# Altium PCB OFFICIAL_PCB.PcbDoc (part 1 of 2)
Units mil, origin at the board's own origin, x right, y up, seen from the top; angles counter-clockwise.
Board outline 1720 x 1725 mil, 2 copper layers (Top Layer, Bottom Layer); 67 components, 51 nets, 260 pads, 158 vias.
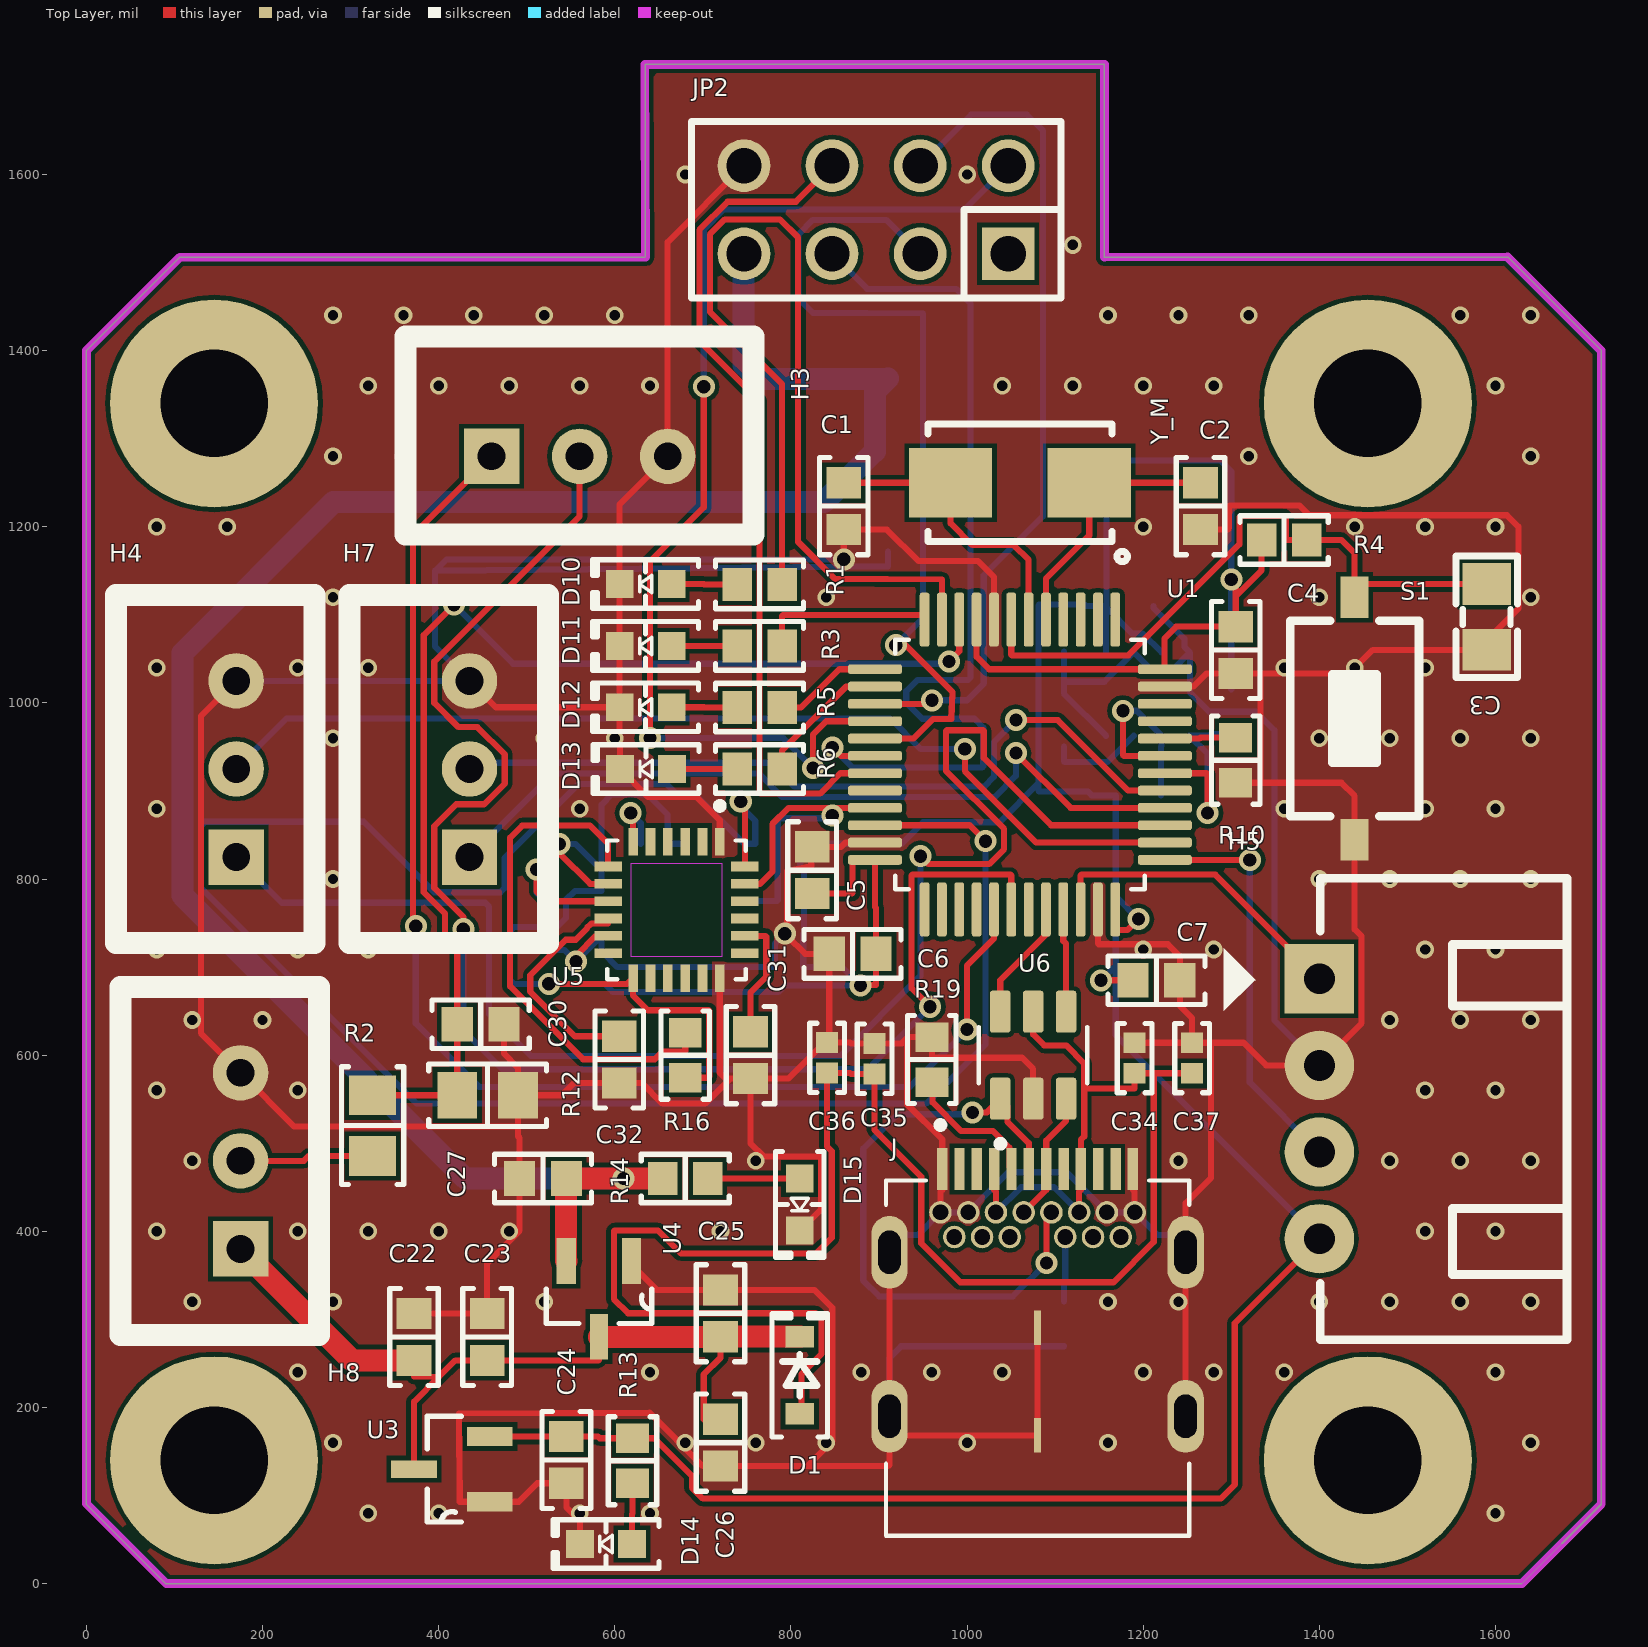
[diagram p0: Top Layer view]
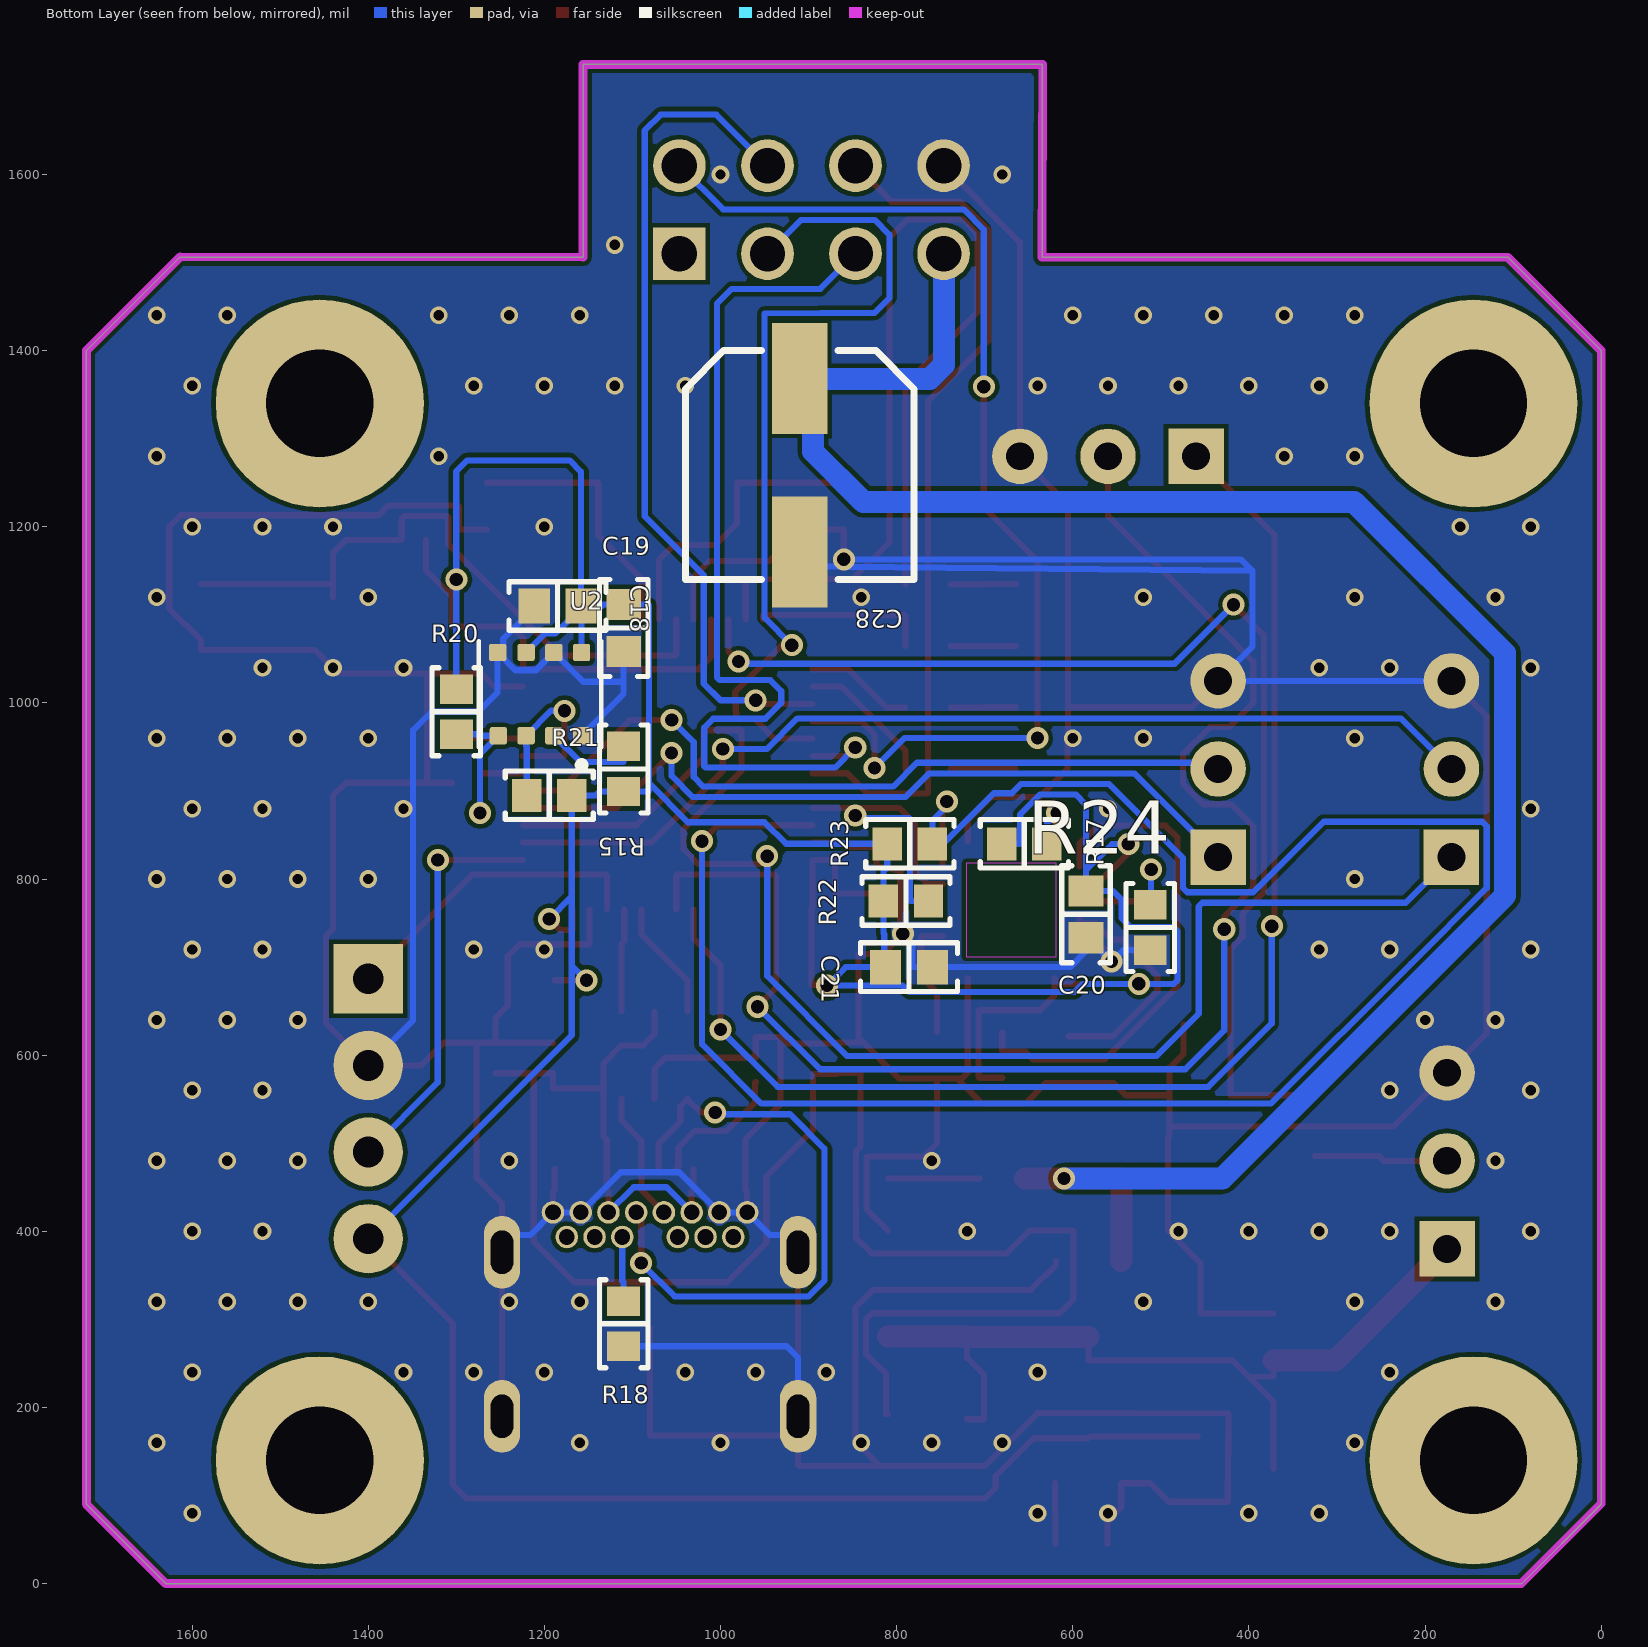
[diagram p1: Bottom Layer view, seen from below]
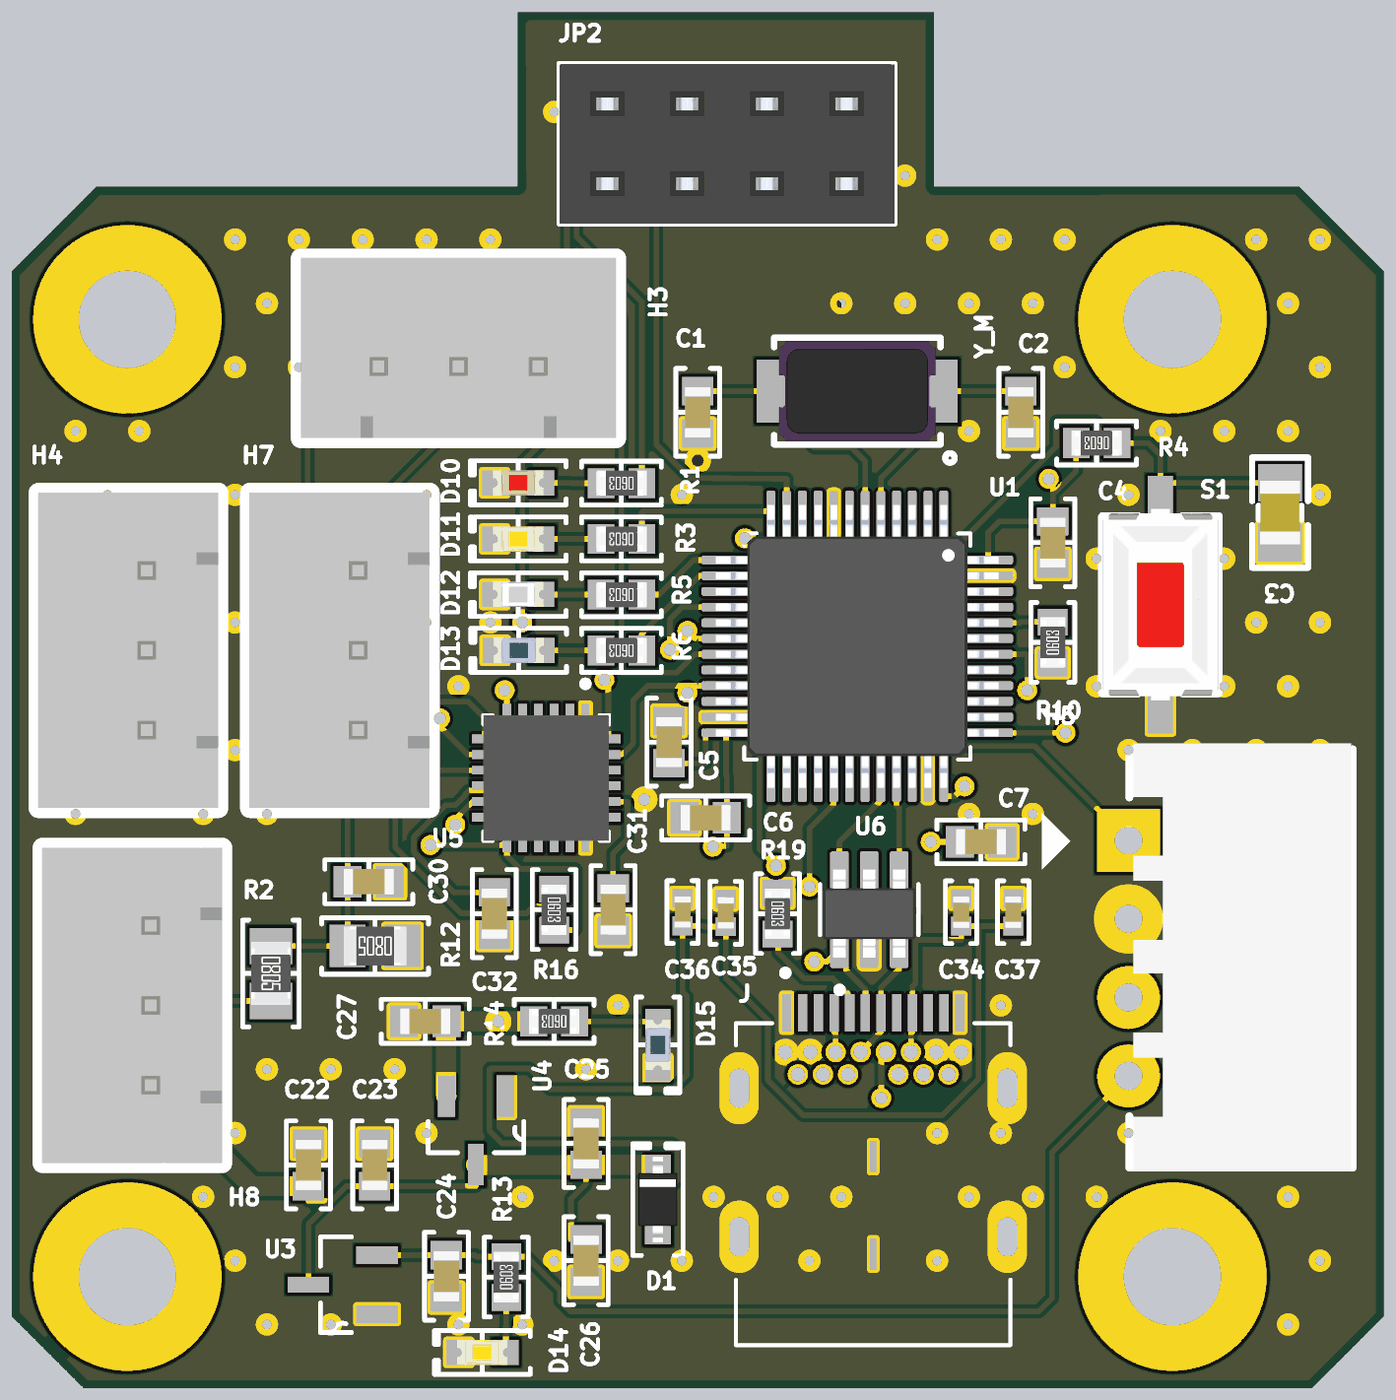
[diagram p2: 3D render of the assembled board from above, using the file's embedded part models]
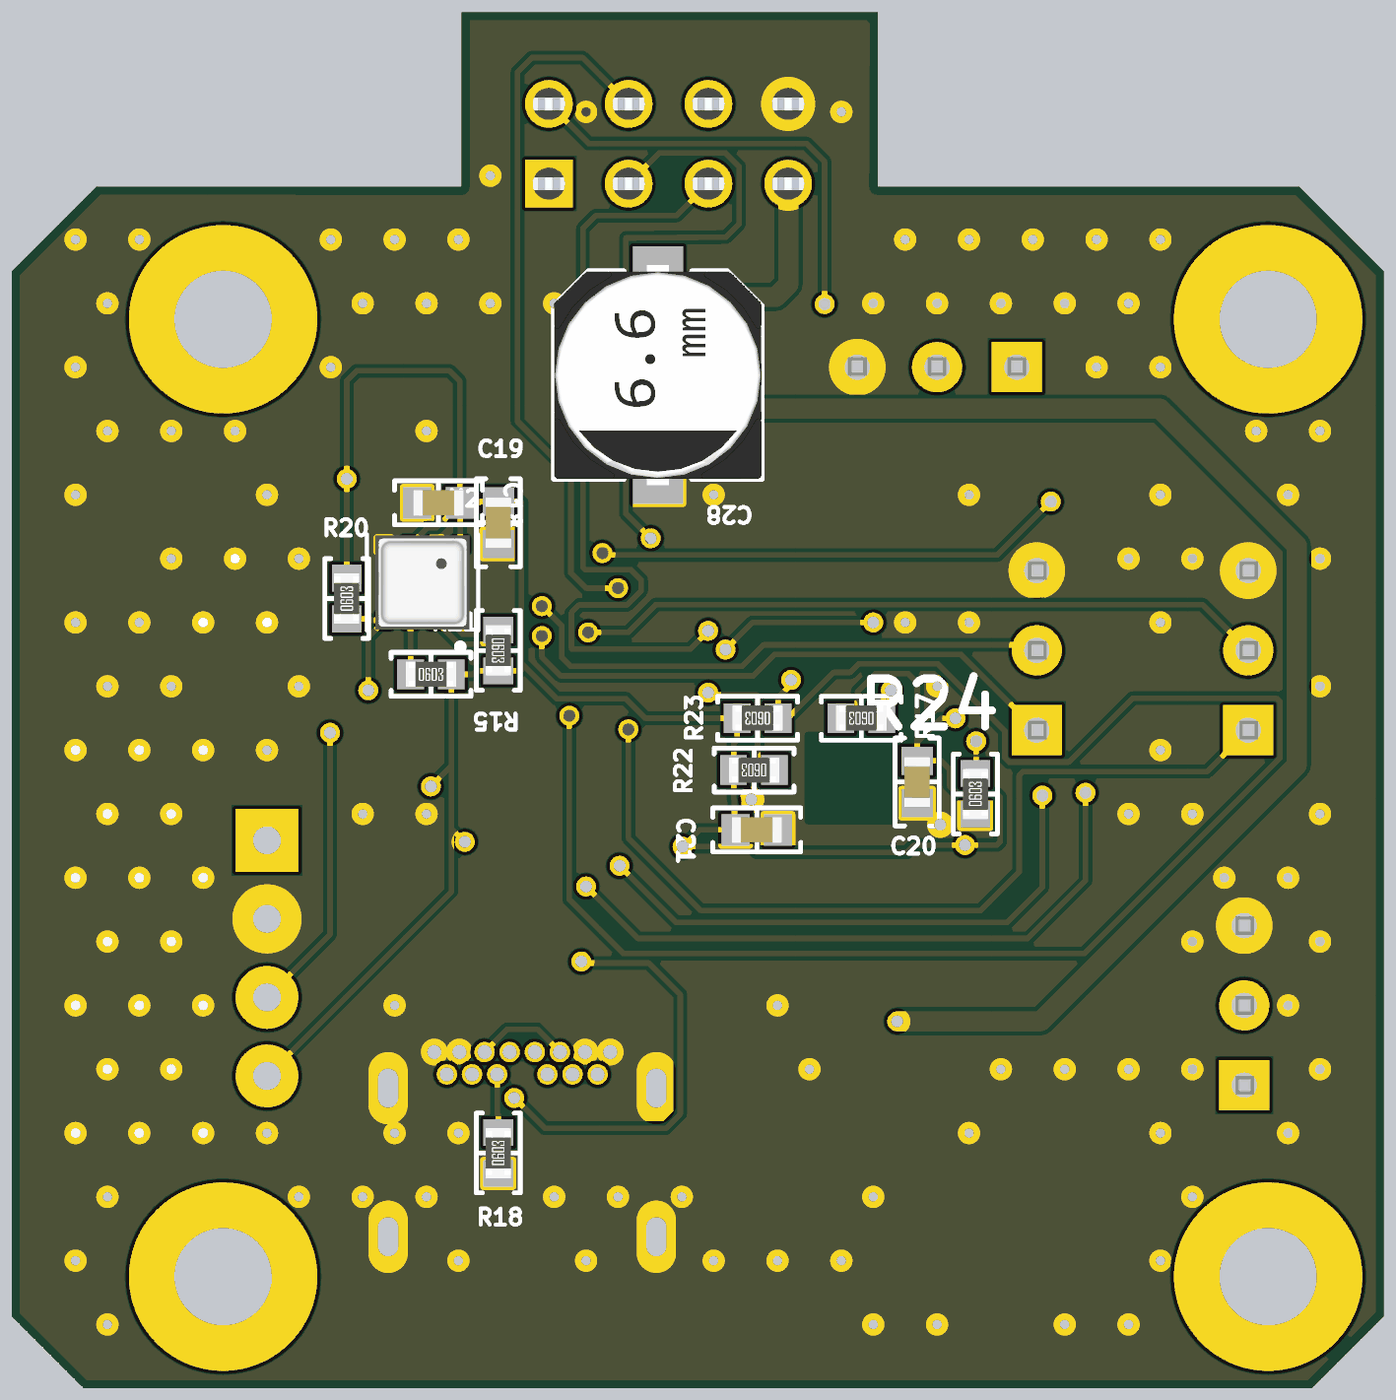
[diagram p3: 3D render of the assembled board from below, using the file's embedded part models]

## Layer stack, top to bottom
Top Solder: solder mask 0.4, Solder Resist, Dk 3.5
Top Layer: signal copper 1.4
Dielectric 1: dielectric 12.6, FR-4, Dk 4.8
Bottom Layer: signal copper 1.4
Bottom Solder: solder mask 0.4, Solder Resist, Dk 3.5

## Board outline
90,0 1630,0 1720,90 1720,1400 1613.85,1506.15 1156,1506.15 1156,1725 634.5,1725 634.5,1506.15 106.15,1506.15 0,1400 0,90

## Design rules (kind name [scope] priority, off if disabled: settings)
Clearance [All] p1: gap=5 ignorepadtopadclearanceinfootprint=FALSE
PolygonConnect PolygonConnect_2 [All vs IsNamedPolygon('GND_L02_P000')] p1: connectstyle=Direct reliefconductorwidth=10 reliefentries=4 polygonreliefangle="90 Angle" airgapwidth=10
PolygonConnect PolygonConnect_1 [All vs IsNamedPolygon('GND_L01_P001')] p2: connectstyle=Direct reliefconductorwidth=10 reliefentries=4 polygonreliefangle="90 Angle" airgapwidth=10
PolygonConnect [All] p3: connectstyle=Relief reliefconductorwidth=10 reliefentries=4 polygonreliefangle="90 Angle" airgapwidth=10
RoutingVias [All] p1: holewidth=15 width=25 viastyle="Through Hole" minholewidth=10 minwidth=10 maxholewidth=25 maxwidth=30
SolderMaskExpansion [All] p1: expansion=4 istentingtop=FALSE
Width [All] p1: maxlimit=30 minlimit=7 preferedwidth=7 minimp=50.000000 maximp=50.000000 favimp=50.000000
30 further rules are at their usual default settings.

## Classes and differential pairs
component class Sensor: C18 C19 C20 C21 C28 C31 C32 C34 C35 C36 C37 D1 H3 H4 H7 J JP2 R15 R16 R17 R18 R19 R20 R21 R22 R23 R24 U2 U5 U6
component class Power_Supply: C22 C23 C24 C25 C26 C27 D14 D15 R13 R14 U3 U4
component class MCU: C1 C2 C3 C4 C5 C6 C7 C30 D10 D11 D12 D13 H5 H8 R1 R2 R3 R4 R5 R6 R10 R12 S1 U1 Y_M

## Components (designator, comment, footprint, x,y, rotation, side; value= is the part's Value field where it differs from the comment)
C1 "20 pF" "CAP 0603_1608" 860,1223.43 r90 top
C2 "20 pF" "CAP 0603_1608" 1265,1223.43 r90 top
C3 "20pF" "tu 0805" 1590,1097.77 r270 top
C4 "0.1 µF" "CAP 0603_1608" 1305,1060 r90 top
C5 "0.1 µF" "CAP 0603_1608" 824,810 r270 top
C6 "0.1 µF" "CAP 0603_1608" 870,715 r0 top
C7 "0.1 µF" "CAP 0603_1608" 1215,685 r180 top
C18 "0.1 µF" "CAP 0603_1608" 1185,1110 r180 bottom
C19 "0.1 µF" "CAP 0603_1608" 1110,1085 r90 bottom
C20 "0.1 µF" "CAP 0603_1608" 585,760 r90 bottom
C21 "0.1 µF" "CAP 0603_1608" 785.98,700 r180 bottom
C22 "10 µF" "CAP 0603_1608" 372,280 r270 top
C23 "0.1µF" "CAP 0603_1608" 455,280 r270 top
C24 "10 µF" "CAP 0603_1608" 545,140.43 r90 top
C25 "10 µF" "CAP 0603_1608" 720,306.93 r270 top
C26 "0.1µF" "CAP 0603_1608" 720,160 r90 top
C27 "10 µF" "CAP 0603_1608" 518.43,460 r0 top
C28 "220 µF" "CAP ALSMD 6.6MM H6.1MM" 910,1270 r270 bottom
C30 "0.1 µF" "CAP 0603_1608" 447.68,635 r180 top
C31 "220 pF" "CAP 0603_1608" 754,600 r90 top
C32 "0.1 µF" "CAP 0603_1608" 605,595 r90 top
C34 "0.1 µF" "CAP 0402_1005" 1190.24,596.73 r90 top
C35 "0.1 µF" "CAP 0402_1005" 895,596 r90 top
C36 "0.1 µF" "CAP 0402_1005" 841,597 r90 top
C37 "0.1 µF" "CAP 0402_1005" 1255.51,596.73 r90 top
D1 "BAT60JFILM" SOD323 810,236.56 r90 top
D10 "Red" "LED 0603_1608 RED" 635,1135 r180 top
D11 "Yellow" "LED 0603_1608 YELLOW" 635,1064.71 r180 top
D12 "Green" "LED 0603_1608 GREEN" 635,995 r180 top
D13 "Blue" "LED 0603_1608 BLUE" 635.47,925 r180 top
D14 "Yellow" "LED 0603_1608 YELLOW" 590,45 r180 top
D15 "Blue" "LED 0603_1608 BLUE" 810,430.47 r270 top
H3 "Header 3P 2.54 Duc Thang" XH2.54M-3 460,1280 r0 top
H4 "Header 3P 2.54 Duc Thang" XH2.54M-3 170,825 r90 top
H5 "Header 4P 2.54 Duc Cong" "Header 4P DC 2.54" 1401,685.85 r0 top
H7 "Header 3P 2.54 Duc Thang" XH2.54M-3 435,825 r90 top
H8 "Header 3P 2.54 Duc Thang" XH2.54M-3 175,380 r90 top
J "SS-52400-002" BELFUSE_SS-52400-002 1080,190 r0 top
JP2 "JP 2x4 2.54" "JP 2x4 CT" 896.68,1560 r180 top
R1 "680 Ohms" "RES 0603_1608" 764.41,1134.57 r180 top
R2 "68 kOhms" "RES 0805_2012" 325,520 r270 top
R3 "680 Ohms" "RES 0603_1608" 764.41,1064.71 r180 top
R4 "10 kOhms" "RES 0603_1608" 1360,1185 r180 top
R5 "680 Ohms" "RES 0603_1608" 764.41,994.86 r180 top
R6 "680 Ohms" "RES 0603_1608" 764.41,925 r180 top
R10 "10 kOhms" "RES 0603_1608" 1305,935 r90 top
R12 "10 kOhms" "RES 0805_2012" 455.55,554.45 r180 top
R13 "680 Ohms" "RES 0603_1608" 620,139.44 r90 top
R14 "680 Ohms" "RES 0603_1608" 680,460 r180 top
R15 "10 kOhms" "RES 0603_1608" 1110,925 r270 bottom
R16 "4.7 kOhms" "RES 0603_1608" 680,600 r270 top
R17 "4.7 kOhms" "RES 0603_1608" 655,840 r0 bottom
R18 "5.11 Ohms" "RES 0603_1608" 1110,295 r90 bottom
R19 "5.11 Ohms" "RES 0603_1608" 960,595 r270 top
R20 "4.7 kOhms" "RES 0603_1608" 1300,990 r90 bottom
R21 "4.7 kOhms" "RES 0603_1608" 1194.41,895 r180 bottom
R22 "4.7 kOhms" "RES 0603_1608" 789.41,775 r0 bottom
R23 "4.7 kOhms" "RES 0603_1608" 785,840 r0 bottom
R24 "4.7 kOhms" "RES 0603_1608" 512,745 r90 bottom
S1 "SW-SMD" SW-SMD 1440,982.2 r90 top
U1 "STM32F103C8T6" QFP50P900X900X160-48N 1060,930 r270 top
U2 "BME680" PSON80P300X300X100-8N 1205,1010 r270 bottom
U3 "MCP1700T-3302E/TT" SOT95P237X112-3N 415,130 r180 top
U4 "MCP1700T-3302E/TT" SOT95P237X112-3N 582,323.36 r270 top
U5 "MPU-6050" QFN50P400X400X95-24N 670,765 r270 top
U6 "USBLC6-2SC6" SOT95P280X145-6N 1075,600 r90 top
Y_M "8 MHz" "NDK NX5032GA" 1060,1250 r0 top

## Footprints (in the part's own frame and the unit in brackets; to place one, negate y for a bottom-side part, rotate by r counter-clockwise, add the part's x,y. Pads: shape width x height; smd on the part's side, far side on the other; paste and mask are expansions set on the pad)
BELFUSE_SS-52400-002 [mm]
  rect 0.3x1.2 smd: A1(-2.75,7.13) A2(-2.25,7.13) A3(-1.75,7.13) A4(-1.25,7.13) A5(-0.75,7.13) A6(-0.25,7.13) A7(0.25,7.13) A8(0.75,7.13) A9(1.25,7.13) A10(1.75,7.13) A11(2.25,7.13) A12(2.75,7.13)
  round 0.65 hole 0.45: B1(2.8,5.88) B2(2.4,5.17) B3(1.6,5.17) B4(1.2,5.88) B5(0.8,5.17) B6(0.4,5.88) B7(-0.4,5.88) B8(-0.8,5.17) B9(-1.2,5.88) B10(-1.6,5.17) B11(-2.4,5.17) B12(-2.8,5.88) G1(2,5.88) G2(-2,5.88)
  rect 0.2x1 smd: G3(0,2.55) G4(0,-0.55)
  oval 1.05x2.1 hole 0.65 slot 1.25 at 90 deg: S1(-4.27,4.73) S2(4.27,4.73) S3(-4.27,0) S4(4.27,0)
  silkscreen extent -4.37,-3.45 4.37,8.5
"CAP 0402_1005" [mm] "Chip Capacitor, 2-Leads, Body 1.02x0.51mm, IPC Medium Density"
  rect 0.6x0.64 smd: 1(-0.44,0) 2(0.44,0)
  silkscreen extent -1,-0.5 1,0.5, body extent -0.5,-0.26 0.5,0.26, height 0.52
"CAP 0603_1608" [mm] "Chip Capacitor, 2-Leads, Body 1.60x0.80mm, IPC Medium Density"
  rect 0.9x1 smd: 1(-0.675,0) 2(0.675,0)
  silkscreen extent -1.4,-0.7 1.4,0.7, body extent -0.8,-0.41 0.8,0.41, height 0.82
"CAP ALSMD 6.6MM H6.1MM" [mm] "Aluminum Electrolytic Capacitor, Body 6.60x6.60x6.10mm, IPC Low Density"
  rect 3.2x1.6 smd: 1(-2.5,0) 2(2.5,0)
  silkscreen extent -3.3,-3.3 3.3,3.3, body extent -3.5,-3.3 3.5,3.3, height 6.1
"Header 4P DC 2.54" [mil]
  rect 78.74x78.74 hole 35: 1(-1,1)
  round 78.74 hole 35: 2(-1,-97.42) 3(-1,-195.85) 4(-1,-294.28)
  silkscreen extent -110,-409 280,115, body extent 5,-413 278,123, height 290
"JP 2x4 CT" [mm] "8 pins, dual row, straight, gold plating"
  rect 1.52x1.52 hole 1.02: 1(-3.81,1.27)
  round 1.52 hole 1.02: 2(-1.27,1.27) 3(1.27,1.27) 4(3.81,1.27) 5(3.81,-1.27) 6(1.27,-1.27) 7(-1.27,-1.27) 8(-3.81,-1.27)
  silkscreen extent -5.33,-2.54 5.33,2.54, body extent -5.33,-2.54 5.33,2.54, height 8.51
"LED 0603_1608 BLUE" [mm] "Chip Diode, 2-Leads, Body 1.60x0.80mm, IPC Medium Density"
  rect 0.8x0.8 smd: 1(-0.75,0) 2(0.75,0)
  silkscreen extent -1.52,-0.7 1.52,0.7, body extent -0.8,-0.4 0.8,0.4, height 0.53
"LED 0603_1608 GREEN" [mm] "Chip Diode, 2-Leads, Body 1.60x0.80mm, IPC Medium Density"
  rect 0.8x0.8 smd: 1(-0.75,0) 2(0.75,0)
  silkscreen extent -1.52,-0.7 1.52,0.7, body extent -0.8,-0.4 0.8,0.4, height 0.53
"LED 0603_1608 RED" [mm] "Chip Diode, 2-Leads, Body 1.60x0.80mm, IPC Medium Density"
  rect 0.8x0.8 smd: 1(-0.75,0) 2(0.75,0)
  silkscreen extent -1.52,-0.7 1.52,0.7, body extent -0.8,-0.4 0.8,0.4, height 0.53
"LED 0603_1608 YELLOW" [mm] "Chip Diode, 2-Leads, Body 1.60x0.80mm, IPC Medium Density"
  rect 0.8x0.8 smd: 1(-0.75,0) 2(0.75,0)
  silkscreen extent -1.52,-0.7 1.52,0.7, body extent -0.8,-0.4 0.8,0.4, height 0.53
"NDK NX5032GA" [mm] "Crystal, 2-Leads, Body 5.00x3.20mm, IPC Medium Density"
  rect 2.4x2 smd: 1(-2,0) 2(2,0)
  silkscreen extent -2.65,-1.7 2.65,1.7, body extent -2.5,-1.6 2.5,1.6, height 1.2
PSON80P300X300X100-8N [mm]
  rrect25% 0.5x0.5 smd: 1(1.2,1.2) 2(1.2,0.4) 3(1.2,-0.4) 4(1.2,-1.2) 5(-1.2,-1.22) 6(-1.2,-0.4) 7(-1.2,0.4) 8(-1.2,1.2)
  silkscreen extent -1.53,-1.77 2.14,1.77, body extent -1.5,-1.5 1.5,1.5, height 1
QFN50P400X400X95-24N [mm]
  rect 0.79x0.28 smd: 1(-1.97,1.25) 2(-1.97,0.75) 3(-1.97,0.25) 4(-1.97,-0.25) 5(-1.97,-0.75) 6(-1.97,-1.25) 13(1.97,-1.25) 14(1.97,-0.75) 15(1.97,-0.25) 16(1.97,0.25) 17(1.97,0.75) 18(1.97,1.25)
  rect 0.28x0.79 smd: 7(-1.25,-1.97) 8(-0.75,-1.97) 9(-0.25,-1.97) 10(0.25,-1.97) 11(0.75,-1.97) 12(1.25,-1.97) 19(1.25,1.97) 20(0.75,1.97) 21(0.25,1.97) 22(-0.25,1.97) 23(-0.75,1.97) 24(-1.25,1.97)
  Keep-Out Layer region: 1.35,-1.3 -1.35,-1.3 -1.35,1.3 1.35,1.3
  silkscreen extent -3.1,-2 2,2, body extent -2,-2 2,2, height 0.93
QFP50P900X900X160-48N [mm]
  rrect50% 1.56x0.28 smd: 1(-4.18,2.75) 2(-4.18,2.25) 3(-4.18,1.75) 4(-4.18,1.25) 5(-4.18,0.75) 6(-4.18,0.25) 7(-4.18,-0.25) 8(-4.18,-0.75) 9(-4.18,-1.25) 10(-4.18,-1.75) 11(-4.18,-2.25) 12(-4.18,-2.75) 25(4.18,-2.75) 26(4.18,-2.25) 27(4.18,-1.75) 28(4.18,-1.25) 29(4.18,-0.75) 30(4.18,-0.25) 31(4.18,0.25) 32(4.18,0.75) 33(4.18,1.25) 34(4.18,1.75) 35(4.18,2.25) 36(4.18,2.75)
  rrect50% 0.28x1.56 smd: 13(-2.75,-4.18) 14(-2.25,-4.18) 15(-1.75,-4.18) 16(-1.25,-4.18) 17(-0.75,-4.18) 18(-0.25,-4.18) 19(0.25,-4.18) 20(0.75,-4.18) 21(1.25,-4.18) 22(1.75,-4.18) 23(2.25,-4.18) 24(2.75,-4.18) 37(2.75,4.18) 38(2.25,4.18) 39(1.75,4.18) 40(1.25,4.18) 41(0.75,4.18) 42(0.25,4.18) 43(-0.25,4.18) 44(-0.75,4.18) 45(-1.25,4.18) 46(-1.75,4.18) 47(-2.25,4.18) 48(-2.75,4.18)
  silkscreen extent -6.15,-3.6 3.6,3.6, body extent -4.5,-4.5 4.5,4.5, height 1.6
"RES 0603_1608" [mm] "Chip Resistor, 2-Leads, Body 1.60x0.80mm, IPC Medium Density"
  rect 0.85x0.95 smd: 1(-0.65,0) 2(0.65,0)
  silkscreen extent -1.27,-0.7 1.27,0.7, body extent -0.8,-0.4 0.8,0.4, height 0.45
"RES 0805_2012" [mm] "Chip Resistor, 2-Leads, Body 2.00x1.25mm, IPC Medium Density"
  rect 1.15x1.35 smd: 1(-0.875,0) 2(0.875,0)
  silkscreen extent -1.7,-0.9 1.7,0.9, body extent -1,-0.62 1,0.63, height 0.6
SOD323 [mm] "SOD, 2-Leads, Body 1.25x2.50mm, IPC Medium Density"
  rect 0.625x0.83 smd: 1(-1.113,0) 2(1.113,0)
  silkscreen extent -1.78,-0.8 1.78,0.8, body extent -1.36,-0.62 1.36,0.62, height 1.05
SOT95P237X112-3N [mil]
  rect 52x22 smd: 1(-43,37) 2(-43,-37)
  rect 52x20 smd: 3(43,0)
  silkscreen extent -11,-60 28,60
SOT95P280X145-6N [mm]
  rrect25% 1.21x0.59 smd: 1(-1.255,0.95) 2(-1.255,0) 3(-1.255,-0.95) 4(1.255,-0.95) 5(1.255,0) 6(1.255,0.95)
  silkscreen extent -2.65,-1.56 0.81,1.56, body extent -1.53,-1.46 1.27,1.46, height 1.4
SW-SMD [mm] "Switch SMD type"
  rect 1.2x0.8 smd: 1(-3.5,0) 2(3.5,0)
  silkscreen extent -2.82,-1.85 2.82,1.85, body extent -3.05,-1.85 3.05,1.85, height 2.5
"tu 0805" [mm] "Compoment SMD 80x50mil"
  rect 1.2x1.4 smd: 1(-0.946,-0.003) 2(0.954,-0.003)
  silkscreen extent -1.75,-0.89 1.75,0.89, body extent -1.01,-0.64 1.01,0.63, height 0.61
XH2.54M-3 [mm]
  rect 1.6x1.6 hole 0.8: 1(0,0)
  round 1.6 hole 0.8: 2(2.54,0) 3(5.08,0)
  silkscreen extent -2.48,-2.26 7.56,3.46, body extent -2.48,-2.26 7.56,3.48, height 6.91

## Part data
C1 C2: library part C0603C200K8HAC7867, "CAP CER 20PF 10V X8R 0603", Device Package="0603 (1608 Metric)", Manufacturer=KEMET, Operating Temperature="-55°C ~ 150°C", Supplier Part Number 1=399-C0603C200K8HAC7867CT-ND, Temperature Coefficient=X8R, Tolerance=±10%, Voltage - Rated=10V, Applications="General Purpose", Capacitance="20 pF", componentlink1description=Datasheet, componentlink1url=https://connect.kemet.com:7667/gateway/IntelliData-ComponentDocumentation/1.0/download/datasheet/C0603C200K8HAC7867, componentlink2description="DigiKey Link", componentlink2url=https://www.digikey.com/en/products/detail/kemet/C0603C200K8HAC7867/7946748, Features="Low ESL, High Temperature", lastupdated="2/9/2024 8:09:18 PM", Lifecycle Status=Active, Minimum Order=1, Mounting Type="Surface Mount, MLCC", Package / Case="0603 (1608 Metric)", packaging=TapeAndReel, Part Number=C0603C200K8HAC7867, Part Status=Active, partid=52193, Price=0.01, series="SMD Comm X8R HT150C", Size / Dimension="0.063\" L x 0.031\" W (1.60mm x 0.80mm)", Supplier 1=DigiKey, Thickness (Max)="0.034\" (0.87mm)"
C3: library part "Tu 0805 20pF 50V 10%", "Dán", Chung_Loai=Dán, Don_Vi=Con, Ma_Hang=MH004558, So_Chan=2, Ten_Linh_Kien="Tụ 0805 20P 10% 50V"
C4 C5 C6 C7: library part VJ0603Y104MXQCW1BC, "CAP CER 0.1UF 10V X7R 0603", Device Package="0603 (1608 Metric)", Manufacturer="Vishay Vitramon", Operating Temperature="-55°C ~ 125°C", Supplier Part Number 1=720-VJ0603Y104MXQCW1BCCT-ND, Temperature Coefficient=X7R, Tolerance=±20%, Voltage - Rated=10V, Applications="General Purpose", Capacitance="0.1 µF", componentlink1description=Datasheet, componentlink1url=https://www.vishay.com/docs/28548/vjw1bcbascomseries.pdf, componentlink2description="DigiKey Link", componentlink2url=https://www.digikey.com/en/products/detail/vishay-vitramon/VJ0603Y104MXQCW1BC/8305323, lastupdated="2/9/2024 8:09:54 PM", Lifecycle Status=Active, Minimum Order=1, Mounting Type="Surface Mount, MLCC", Package / Case="0603 (1608 Metric)", packaging=TapeAndReel, Part Number=VJ0603Y104MXQCW1BC, Part Status=Active, partid=34594, Price=0.01, series="VJ W1BC", Size / Dimension="0.063\" L x 0.031\" W (1.60mm x 0.80mm)", Supplier 1=DigiKey, Thickness (Max)="0.034\" (0.87mm)"
C18 C19 C20 C21 C32: library part C0603C104J8RAC7867, "CAP CER 0.1UF 10V X7R 0603", Device Package="0603 (1608 Metric)", Manufacturer=KEMET, Operating Temperature="-55°C ~ 125°C", Supplier Part Number 1=399-C0603C104J8RAC7867CT-ND, Temperature Coefficient=X7R, Tolerance=±5%, Voltage - Rated=10V, Applications="Bypass, Decoupling", Capacitance="0.1 µF", componentlink1description=Datasheet, componentlink1url=https://connect.kemet.com:7667/gateway/IntelliData-ComponentDocumentation/1.0/download/datasheet/C0603C104J8RACTU, componentlink2description="DigiKey Link", componentlink2url=https://www.digikey.com/en/products/detail/kemet/C0603C104J8RAC7867/2199774, lastupdated="2/9/2024 8:09:18 PM", Lifecycle Status=Active, Minimum Order=1, Mounting Type="Surface Mount, MLCC", Package / Case="0603 (1608 Metric)", packaging=TapeAndReel, Part Number=C0603C104J8RAC7867, Part Status=Active, partid=52171, Price=0.07, series="SMD Comm X7R", Size / Dimension="0.063\" L x 0.031\" W (1.60mm x 0.80mm)", Supplier 1=DigiKey, Thickness (Max)="0.034\" (0.87mm)"
C22 C24 C25 C27: library part KGM15CS60J106MT, "CAP CER 10UF 6.3V X6S 0603", Device Package="0603 (1608 Metric)", Manufacturer="KYOCERA AVX", Operating Temperature="-55°C ~ 105°C", Supplier Part Number 1=478-KGM15CS60J106MTCT-ND, Temperature Coefficient=X6S, Tolerance=±20%, Voltage - Rated=6.3V, Applications="General Purpose", Capacitance="10 µF", componentlink1description=Datasheet, componentlink1url=https://datasheets.kyocera-avx.com/x6s-dielectric.pdf, componentlink2description="DigiKey Link", componentlink2url=https://www.digikey.com/en/products/detail/kyocera-avx/KGM15CS60J106MT/17866394, lastupdated="2/9/2024 8:09:11 PM", Lifecycle Status=Active, Minimum Order=1, Mounting Type="Surface Mount, MLCC", Package / Case="0603 (1608 Metric)", packaging=TapeAndReel, Part Number=KGM15CS60J106MT, Part Status=Active, partid=53178, Price=0.03, series="KGM - X6S", Size / Dimension="0.063\" L x 0.031\" W (1.60mm x 0.80mm)", Supplier 1=DigiKey, Thickness (Max)="0.039\" (1.00mm)"
C23 C26: library part 0603YC104K4T4A, "CAP CER 0.1UF 16V X7R 0603", Device Package="0603 (1608 Metric)", Manufacturer="AVX Corporation", Operating Temperature="-55°C ~ 125°C", Ratings=AEC-Q200, Supplier Part Number 1=478-9382-1-ND, Temperature Coefficient=X7R, Tolerance=±10%, Voltage - Rated=16V, Applications=Automotive, Capacitance=0.1µF, componentlink1description=Datasheet, componentlink1url=http://datasheets.avx.com/AutoMLCC.pdf, componentlink2description="DigiKey Link", componentlink2url=http://digikey.com/product-detail/en/avx-corporation/0603YC104K4T4A/478-9382-1-ND/4901449, lastupdated="9/2/2020 1:03:04 AM", Lifecycle Status=Active, Minimum Order=1, Mounting Type="Surface Mount, MLCC", Package / Case="0603 (1608 Metric)", packaging=TapeAndReel, Part Number=0603YC104K4T4A, Part Status=Active, partid=17140, Price=0.02, series=-, Size / Dimension="0.063\" L x 0.032\" W (1.60mm x 0.81mm)", Supplier 1=DigiKey, Thickness (Max)="0.035\" (0.90mm)"
C28: library part UCM1A221MCL1GS, "CAP ALUM 220UF 20% 10V SMD", Device Package="Radial, Can - SMD", Lifetime @ Temp.="2000 Hrs @ 105°C", Manufacturer=Nichicon, Operating Temperature="-55°C ~ 105°C", Ratings=AEC-Q200, Ripple Current @ High Frequency="300 mA @ 100 kHz", Ripple Current @ Low Frequency="150 mA @ 120 Hz", Supplier Part Number 1=493-17470-1-ND, Tolerance=±20%, Voltage - Rated="10 V", Applications=Automotive, Capacitance="220 µF", componentlink1description=Datasheet, componentlink1url=http://nichicon-us.com/english/products/pdfs/e-ucm.pdf, componentlink2description="DigiKey Link", componentlink2url=https://www.digikey.com/en/products/detail/nichicon/UCM1A221MCL1GS/4991832, Height - Seated (Max)="0.240\" (6.10mm)", Impedance="260 mOhms", lastupdated="6/3/2024 8:16:09 PM", Lifecycle Status=Active, Minimum Order=1, Mounting Type="Surface Mount", Package / Case="Radial, Can - SMD", packaging=TapeAndReel, Part Number=UCM1A221MCL1GS, Part Status=Active, partid=27599, Polarization=Polar, Price=0.13, series=UCM, Size / Dimension="0.248\" Dia (6.30mm)", Supplier 1=DigiKey, Surface Mount Land Size="0.260\" L x 0.260\" W (6.60mm x 6.60mm)"
C30: library part VJ0603Y104KXQCW1BC, "CAP CER 0.1UF 10V X7R 0603", Device Package="0603 (1608 Metric)", Manufacturer="Vishay Vitramon", Operating Temperature="-55°C ~ 125°C", Supplier Part Number 1=720-1689-1-ND, Temperature Coefficient=X7R, Tolerance=±10%, Voltage - Rated=10V, Applications="General Purpose", Capacitance="0.1 µF", componentlink1description=Datasheet, componentlink1url=https://www.vishay.com/docs/28548/vjw1bcbascomseries.pdf, componentlink2description="DigiKey Link", componentlink2url=https://www.digikey.com/en/products/detail/vishay-vitramon/VJ0603Y104KXQCW1BC/8305317, lastupdated="2/9/2024 8:10:06 PM", Lifecycle Status=Active, Minimum Order=1, Mounting Type="Surface Mount, MLCC", Package / Case="0603 (1608 Metric)", packaging=TapeAndReel, Part Number=VJ0603Y104KXQCW1BC, Part Status=Active, partid=17766, Price=0.02, series="VJ W1BC", Size / Dimension="0.063\" L x 0.031\" W (1.60mm x 0.80mm)", Supplier 1=DigiKey, Thickness (Max)="0.034\" (0.87mm)"
C31: library part KGM15AR71A221KT, "CAP CER 220PF 10V X7R 0603", Device Package="0603 (1608 Metric)", Manufacturer="KYOCERA AVX", Operating Temperature="-55°C ~ 125°C", Supplier Part Number 1=478-KGM15AR71A221KTCT-ND, Temperature Coefficient=X7R, Tolerance=±10%, Voltage - Rated=10V, Applications="General Purpose", Capacitance="220 pF", componentlink1description=Datasheet, componentlink1url=https://datasheets.kyocera-avx.com/X7RDielectric.pdf, componentlink2description="DigiKey Link", componentlink2url=https://www.digikey.com/en/products/detail/kyocera-avx/KGM15AR71A221KT/1600720, lastupdated="2/9/2024 8:09:12 PM", Lifecycle Status=Active, Minimum Order=1, Mounting Type="Surface Mount, MLCC", Package / Case="0603 (1608 Metric)", packaging=TapeAndReel, Part Number=KGM15AR71A221KT, Part Status=Active, partid=53248, Price=0.02, series="KGM - X7R", Size / Dimension="0.063\" L x 0.032\" W (1.60mm x 0.81mm)", Supplier 1=DigiKey, Thickness (Max)="0.035\" (0.90mm)"
C34 C35 C36 C37: library part KGM05AR71A104KH, "CAP CER 0.1UF 10V X7R 0402", Device Package="0402 (1005 Metric)", Manufacturer="KYOCERA AVX", Operating Temperature="-55°C ~ 125°C", Supplier Part Number 1=478-KGM05AR71A104KHCT-ND, Temperature Coefficient=X7R, Tolerance=±10%, Voltage - Rated=10V, Applications="General Purpose", Capacitance="0.1 µF", componentlink1description=Datasheet, componentlink1url=https://datasheets.kyocera-avx.com/X7RDielectric.pdf, componentlink2description="DigiKey Link", componentlink2url=https://www.digikey.com/en/products/detail/kyocera-avx/KGM05AR71A104KH/3080133, lastupdated="2/9/2024 8:03:47 PM", Lifecycle Status=Active, Minimum Order=1, Mounting Type="Surface Mount, MLCC", Package / Case="0402 (1005 Metric)", packaging=TapeAndReel, Part Number=KGM05AR71A104KH, Part Status=Active, partid=50766, Price=0.01, series="KGM - X7R", Size / Dimension="0.039\" L x 0.020\" W (1.00mm x 0.50mm)", Supplier 1=DigiKey, Thickness (Max)="0.022\" (0.55mm)"
D1: "DIODE SCHOTTKY 10V 3A SOD323", Current - Average Rectified (Io)=3A, Current - Reverse Leakage @ Vr="6 µA @ 10 V", Manufacturer=STMicroelectronics, Operating Temperature - Junction="150°C (Max)", Package / Case="SC-76, SOD-323", Supplier Device Package=SOD-323, Supplier Part Number 1=497-3707-1-ND, Voltage - DC Reverse (Vr) (Max)="10 V", Voltage - Forward (Vf) (Max) @ If="580 mV @ 1 A", componentlink1description=Datasheet, componentlink1url=http://www.st.com/content/ccc/resource/technical/document/datasheet/3d/d2/27/1d/20/e3/4d/48/CD00001944.pdf/files/CD00001944.pdf/jcr:content/translations/en.CD00001944.pdf, componentlink2description="DigiKey Link", componentlink2url=https://www.digikey.com/en/products/detail/stmicroelectronics/BAT60JFILM/686386, Diode Type=Schottky, lastupdated="6/3/2024 8:20:13 PM", Lifecycle Status=Active, Minimum Order=1, Mounting Type="Surface Mount", packaging=TapeAndReel, Part Number=BAT60JFILM, Part Status=Active, partid=3091, Price=0.04, series=-, Speed="Fast Recovery =< 500ns, > 200mA (Io)", Supplier 1=DigiKey
D10: library part 5975112402F, "LED RED DIFFUSED 0603 SMD", Current - Test=20mA, Device Package="0603 (1608 Metric)", Lens Color=White, Manufacturer=Dialight, Millicandela Rating=11.7mcd, Supplier Device Package=2-SMD, Supplier Part Number 1=350-2890-ND, Voltage - Forward (Vf) (Typ)=1.7V, Color=Red, componentlink1description=Datasheet, componentlink1url=http://www.dialightsignalsandcomponents.com/Assets/Brochures_And_Catalogs/Indication/597-xxxx-4xx.pdf, componentlink2description="DigiKey Link", componentlink2url=https://www.digikey.com/en/products/detail/dialight/5975112402F/2432586, Configuration=Standard, Height (Max)=0.70mm, lastupdated="6/3/2024 7:59:47 PM", Lens Size="1.10mm x 0.80mm", Lens Style="Rectangle with Flat Top", Lens Transparency=Diffused, Lifecycle Status=Active, Minimum Order=1, Mounting Type="Surface Mount", Package / Case="0603 (1608 Metric)", packaging=Strip, Part Number=5975112402F, Part Status=Active, partid=449, Price=0.24, series=597, Size / Dimension="1.60mm L x 0.80mm W", Supplier 1=DigiKey, Viewing Angle=152°, Wavelength - Dominant=647nm, Wavelength - Peak=660nm
D11 D14: library part SML-D15YWT86, "LED YELLOW DIFFUSED 1608 SMD", Current - Test=20mA, Device Package="0603 (1608 Metric)", Lens Color=White, Manufacturer="Rohm Semiconductor", Millicandela Rating=224mcd, Supplier Device Package="1608 (0603)", Supplier Part Number 1=SML-D15YWT86DKR-ND, Voltage - Forward (Vf) (Typ)=2.1V, Color=Yellow, componentlink1description=Datasheet, componentlink1url=http://rohmfs.rohm.com/en/products/databook/datasheet/opto/led/chip_mono/sml-d15-e.pdf, componentlink2description="DigiKey Link", componentlink2url=https://www.digikey.com/en/products/detail/rohm-semiconductor/SML-D15YWT86/5822344, Configuration=Standard, Height (Max)=0.65mm, lastupdated="6/3/2024 8:01:10 PM", Lens Size="1.20mm x 0.80mm", Lens Style="Rectangle with Flat Top", Lens Transparency=Diffused, Lifecycle Status=Active, Minimum Order=1, Mounting Type="Surface Mount", Package / Case="0603 (1608 Metric)", packaging=TapeAndReel, Part Number=SML-D15YWT86, Part Status=Active, partid=114, Price=0.06, series=SML-D15, Size / Dimension="1.60mm L x 0.80mm W", Supplier 1=DigiKey, Wavelength - Dominant=590nm
D12: library part SML-D13M8WT86, "LED GREEN DIFFUSED 1608 SMD", Current - Test=20mA, Device Package="0603 (1608 Metric)", Lens Color=White, Manufacturer="Rohm Semiconductor", Millicandela Rating=40mcd, Supplier Device Package="1608 (0603)", Supplier Part Number 1=846-1198-1-ND, Voltage - Forward (Vf) (Typ)=2.2V, Color=Green, componentlink1description=Datasheet, componentlink1url=https://www.rohm.com/datasheet/SML-D12V8W, componentlink2description="DigiKey Link", componentlink2url=https://www.digikey.com/en/products/detail/rohm-semiconductor/SML-D13M8WT86/4004597, Configuration=Standard, Height (Max)=0.65mm, lastupdated="6/3/2024 7:58:53 PM", Lens Size="1.20mm x 0.80mm", Lens Style="Rectangle with Flat Top", Lens Transparency=Diffused, Lifecycle Status=Active, Minimum Order=1, Mounting Type="Surface Mount", Package / Case="0603 (1608 Metric)", packaging=TapeAndReel, Part Number=SML-D13M8WT86, Part Status=Active, partid=617, Price=0.04, series=EXCELED™, Size / Dimension="1.60mm L x 0.80mm W", Supplier 1=DigiKey, Wavelength - Dominant=572nm
D13 D15: library part "LB Q39G-L2OO-35-1", "LED BLUE DIFFUSED 0603 SMD", Current - Test=5mA, Device Package="0603 (1608 Metric)", Lens Color=White, Manufacturer="OSRAM Opto Semiconductors Inc.", Millicandela Rating=29.5mcd, Supplier Device Package=0603, Supplier Part Number 1=475-2816-1-ND, Voltage - Forward (Vf) (Typ)=2.85V, Color=Blue, componentlink1description=Datasheet, componentlink1url=//media.digikey.com/pdf/Data%20Sheets/Osram%20PDFs/LB_Q39G_v1.4_9-1-15.pdf, componentlink2description="DigiKey Link", componentlink2url=https://www.digikey.com/en/products/detail/osram-opto-semiconductors-inc/LB-Q39G-L2OO-35-1/2176322, Configuration=Standard, Height (Max)=0.40mm, lastupdated="6/3/2024 7:57:52 PM", Lens Size="1.10mm x 0.80mm", Lens Style="Rectangle with Flat Top", Lens Transparency=Diffused, Lifecycle Status=Active, Minimum Order=1, Mounting Type="Surface Mount", Package / Case="0603 (1608 Metric)", packaging=TapeAndReel, Part Number="LB Q39G-L2OO-35-1", Part Status=Active, partid=832, Price=0.06, series="CHIPLED 0603", Size / Dimension="1.60mm L x 0.80mm W", Supplier 1=DigiKey, Viewing Angle="155°, 135°", Wavelength - Dominant=470nm, Wavelength - Peak=472nm
H3 H4 H5 H7 H8: "Cắm", Chung_Loai=Cắm, Don_Vi=Con
  H3 H4 H7 H8: Ma_Hang=MH001292, Ten_Linh_Kien="Header 3P XH2.54-3P Đực Thẳng"
  H5: Ma_Hang=MH001310, Ten_Linh_Kien="Header 4P XH2.54-4P Đực Cong"
J: "USB Type-C Connector", Package=None, Availability=Warning, DigiKey-Purchase-URL=https://snapeda.com/shop?store=DigiKey&id=4629247, MF="Stewart Connector", Mouser-Purchase-URL=https://snapeda.com/shop?store=Mouser&id=4629247, MP=SS-52400-002, Price=None, SnapEDA_Link=https://www.snapeda.com/parts/SS-52400-002/Stewart%20Connector/view-part/4629247/?ref=snap
JP2: library part "JP 2x4 2.54 Cai Thang", "Cắm", Chung_Loai=Cắm, Don_Vi=Con, Ma_Hang=MH008647, Ten_Linh_Kien="Jump Đôi Cái 2.54MM 2x20P Thẳng"
R1 R3 R5 R6: library part CRGCQ0603F680R, "RES 680 OHM 1% 1/10W 0603", Device Package="0603 (1608 Metric)", Manufacturer="TE Connectivity Passive Product", Operating Temperature="-55°C ~ 155°C", Power (Watts)="0.1W, 1/10W", Ratings=AEC-Q200, Supplier Device Package=0603, Supplier Part Number 1=A129686CT-ND, Temperature Coefficient=±100ppm/°C, Tolerance=±1%, componentlink1description=Datasheet, componentlink1url=https://www.te.com/commerce/DocumentDelivery/DDEController?Action=srchrtrv&DocNm=1773204-3&DocType=DS&DocLang=English, componentlink2description="DigiKey Link", componentlink2url=https://www.digikey.com/en/products/detail/te-connectivity-passive-product/CRGCQ0603F680R/8576288, Composition="Thick Film", Features="Automotive AEC-Q200, Moisture Resistant", Height - Seated (Max)="0.022\" (0.55mm)", lastupdated="2/9/2024 8:42:15 PM", Lifecycle Status=Active, Minimum Order=1, Number of Terminations=2, Package / Case="0603 (1608 Metric)", packaging=TapeAndReel, Part Number=CRGCQ0603F680R, Part Status=Active, partid=23982, Price=0.01, Resistance="680 Ohms", series=CRGCQ, Size / Dimension="0.063\" L x 0.031\" W (1.60mm x 0.80mm)", Supplier 1=DigiKey
R2: library part RR1220P-683-D, "RES SMD 68K OHM 0.5% 1/10W 0805", Device Package="0805 (2012 Metric)", Manufacturer=Susumu, Operating Temperature="-55°C ~ 125°C", Power (Watts)="0.1W, 1/10W", Supplier Part Number 1=RR12P68.0KDCT-ND, Temperature Coefficient=±25ppm/°C, Tolerance=±0.5%, componentlink1description=Datasheet, componentlink1url=http://www.susumu.co.jp/common/pdf/n_catalog_partition05_en.pdf, componentlink2description="DigiKey Link", componentlink2url=https://www.digikey.com/en/products/detail/susumu/RR1220P-683-D/432335, Composition="Thin Film", Height - Seated (Max)="0.020\" (0.50mm)", lastupdated="2/8/2024 9:01:51 PM", Lifecycle Status=Active, Minimum Order=1, Number of Terminations=2, Package / Case="0805 (2012 Metric)", packaging=TapeAndReel, Part Number=RR1220P-683-D, Part Status=Active, partid=39193, Price=0.01, Resistance="68 kOhms", series=RR, Size / Dimension="0.079\" L x 0.049\" W (2.00mm x 1.25mm)", Supplier 1=DigiKey
R4 R10: library part CRCW060310K0FHEAP, "RES SMD 10K OHM 1% 1/10W 0603", Device Package="0603 (1608 Metric)", Manufacturer="Vishay Dale", Operating Temperature="-55°C ~ 155°C", Power (Watts)="0.1W, 1/10W", Ratings=AEC-Q200, Supplier Device Package=0603, Supplier Part Number 1=541-CRCW060310K0FHEAPCT-ND, Temperature Coefficient=±50ppm/°C, Tolerance=±1%, componentlink1description=Datasheet, componentlink1url=http://www.vishay.com/docs/20036/dcrcwpe3.pdf, componentlink2description="DigiKey Link", componentlink2url=https://www.digikey.com/en/products/detail/vishay-dale/CRCW060310K0FHEAP/5070668, Composition="Thick Film", Features="Automotive AEC-Q200", Height - Seated (Max)="0.020\" (0.50mm)", lastupdated="2/9/2024 8:41:44 PM", Lifecycle Status=Active, Minimum Order=1, Number of Terminations=2, Package / Case="0603 (1608 Metric)", packaging=TapeAndReel, Part Number=CRCW060310K0FHEAP, Part Status=Active, partid=56447, Price=0.03, Resistance="10 kOhms", series=CRCW-P, Size / Dimension="0.063\" L x 0.033\" W (1.60mm x 0.85mm)", Supplier 1=DigiKey
R12: library part RNCS0805BKE10K0, "RES 10K OHM 0.1% 1/10W 0805", Device Package="0805 (2012 Metric)", Manufacturer="Stackpole Electronics Inc", Operating Temperature="-55°C ~ 155°C", Power (Watts)="0.1W, 1/10W", Ratings=AEC-Q200, Supplier Device Package=0805, Supplier Part Number 1=RNCS0805BKE10K0CT-ND, Temperature Coefficient=±25ppm/°C, Tolerance=±0.1%, componentlink1description=Datasheet, componentlink1url=https://www.seielect.com/catalog/sei-rncs_rnch.pdf, componentlink2description="DigiKey Link", componentlink2url=https://www.digikey.com/en/products/detail/stackpole-electronics-inc/RNCS0805BKE10K0/1800067, Composition="Thin Film", Features="Anti-Corrosive, Automotive AEC-Q200, Moisture Resistant", Height - Seated (Max)="0.026\" (0.65mm)", lastupdated="2/8/2024 9:02:39 PM", Lifecycle Status=Active, Minimum Order=1, Number of Terminations=2, Package / Case="0805 (2012 Metric)", packaging=TapeAndReel, Part Number=RNCS0805BKE10K0, Part Status=Active, partid=27713, Price=0.07, Resistance="10 kOhms", series=RNCS, Size / Dimension="0.079\" L x 0.049\" W (2.00mm x 1.25mm)", Supplier 1=DigiKey
R13 R14: library part CRCW0603680RFKEA, "RES SMD 680 OHM 1% 1/10W 0603", Device Package="0603 (1608 Metric)", Manufacturer="Vishay Dale", Operating Temperature="-55°C ~ 155°C", Power (Watts)="0.1W, 1/10W", Ratings=AEC-Q200, Supplier Device Package=0603, Supplier Part Number 1=541-680HCT-ND, Temperature Coefficient=±100ppm/°C, Tolerance=±1%, componentlink1description=Datasheet, componentlink1url=http://www.vishay.com/docs/20035/dcrcwe3.pdf, componentlink2description="DigiKey Link", componentlink2url=https://www.digikey.com/en/products/detail/vishay-dale/CRCW0603680RFKEA/1174649, Composition="Thick Film", Features="Automotive AEC-Q200", Height - Seated (Max)="0.020\" (0.50mm)", lastupdated="2/9/2024 8:43:05 PM", Lifecycle Status=Active, Minimum Order=1, Number of Terminations=2, Package / Case="0603 (1608 Metric)", packaging=CutTape, Part Number=CRCW0603680RFKEA, Part Status=Active, partid=12674, Price=0.01, Resistance="680 Ohms", series=CRCW, Size / Dimension="0.061\" L x 0.033\" W (1.55mm x 0.85mm)", Supplier 1=DigiKey
R15: library part CRCW060310K0FKEA, "RES SMD 10K OHM 1% 1/10W 0603", Device Package="0603 (1608 Metric)", Manufacturer="Vishay Dale", Operating Temperature="-55°C ~ 155°C", Power (Watts)="0.1W, 1/10W", Ratings=AEC-Q200, Supplier Device Package=0603, Supplier Part Number 1=541-10.0KHCT-ND, Temperature Coefficient=±100ppm/°C, Tolerance=±1%, componentlink1description=Datasheet, componentlink1url=http://www.vishay.com/docs/20035/dcrcwe3.pdf, componentlink2description="DigiKey Link", componentlink2url=https://www.digikey.com/en/products/detail/vishay-dale/CRCW060310K0FKEA/1174782, Composition="Thick Film", Features="Automotive AEC-Q200", Height - Seated (Max)="0.020\" (0.50mm)", lastupdated="2/9/2024 8:42:10 PM", Lifecycle Status=Active, Minimum Order=1, Number of Terminations=2, Package / Case="0603 (1608 Metric)", packaging=CutTape, Part Number=CRCW060310K0FKEA, Part Status=Active, partid=24636, Price=0.01, Resistance="10 kOhms", series=CRCW, Size / Dimension="0.061\" L x 0.033\" W (1.55mm x 0.85mm)", Supplier 1=DigiKey
R16 R17 R22 R23 R24: library part CR0603-FX-4701ELF, "RES SMD 4.7K OHM 1% 1/10W 0603", Device Package="0603 (1608 Metric)", Manufacturer="Bourns Inc.", Operating Temperature="-55°C ~ 155°C", Power (Watts)="0.1W, 1/10W", Supplier Device Package=0603, Supplier Part Number 1=CR0603-FX-4701ELFCT-ND, Temperature Coefficient=±100ppm/°C, Tolerance=±1%, componentlink1description=Datasheet, componentlink1url=https://www.bourns.com/docs/Product-Datasheets/CHPREZTR.pdf, componentlink2description="DigiKey Link", componentlink2url=https://www.digikey.com/en/products/detail/bourns-inc/CR0603-FX-4701ELF/3740916, Composition="Thick Film", Features="Moisture Resistant", Height - Seated (Max)="0.022\" (0.55mm)", lastupdated="2/9/2024 8:42:33 PM", Lifecycle Status=Active, Minimum Order=1, Number of Terminations=2, Package / Case="0603 (1608 Metric)", packaging=CutTape, Part Number=CR0603-FX-4701ELF, Part Status=Active, partid=21073, Price=0.01, Resistance="4.7 kOhms", series=CR0603, Size / Dimension="0.063\" L x 0.031\" W (1.60mm x 0.80mm)", Supplier 1=DigiKey
R18 R19: library part RMCF0603FT5R11, "RES 5.11 OHM 1% 1/10W 0603", Device Package="0603 (1608 Metric)", Manufacturer="Stackpole Electronics Inc", Operating Temperature="-55°C ~ 155°C", Power (Watts)="0.1W, 1/10W", Ratings=AEC-Q200, Supplier Device Package=0603, Supplier Part Number 1=738-RMCF0603FT5R11CT-ND, Temperature Coefficient=±200ppm/°C, Tolerance=±1%, componentlink1description=Datasheet, componentlink1url=https://www.seielect.com/catalog/sei-rmcf_rmcp.pdf, componentlink2description="DigiKey Link", componentlink2url=https://www.digikey.com/en/products/detail/stackpole-electronics-inc/RMCF0603FT5R11/1714085, Composition="Thick Film", Features="Automotive AEC-Q200", Height - Seated (Max)="0.022\" (0.55mm)", lastupdated="2/9/2024 8:42:17 PM", Lifecycle Status=Active, Minimum Order=1, Number of Terminations=2, Package / Case="0603 (1608 Metric)", packaging=CutTape, Part Number=RMCF0603FT5R11, Part Status=Active, partid=23818, Price=0.01, Resistance="5.11 Ohms", series=RMCF, Size / Dimension="0.061\" L x 0.031\" W (1.55mm x 0.80mm)", Supplier 1=DigiKey
R20 R21: library part SG73S1JTTD4701F, "RES 4.7K OHM 1% 1/5W 0603", Device Package="0603 (1608 Metric)", Manufacturer="KOA Speer Electronics, Inc.", Operating Temperature="-55°C ~ 155°C", Power (Watts)="0.2W, 1/5W", Ratings=AEC-Q200, Supplier Device Package=0603, Supplier Part Number 1=2019-SG73S1JTTD4701FCT-ND, Temperature Coefficient=±100ppm/°C, Tolerance=±1%, componentlink1description=Datasheet, componentlink1url=https://www.koaspeer.com/pdfs/SG73S.pdf, componentlink2description="DigiKey Link", componentlink2url=https://www.digikey.com/en/products/detail/koa-speer-electronics-inc/SG73S1JTTD4701F/10289615, Composition="Thick Film", Features="Automotive AEC-Q200, Moisture Resistant, Pulse Withstanding", Height - Seated (Max)="0.022\" (0.55mm)", lastupdated="2/9/2024 8:40:42 PM", Lifecycle Status=Active, Minimum Order=1, Number of Terminations=2, Package / Case="0603 (1608 Metric)", packaging=TapeAndReel, Part Number=SG73S1JTTD4701F, Part Status=Active, partid=77387, Price=0.01, Resistance="4.7 kOhms", series=SG73S, Size / Dimension="0.063\" L x 0.031\" W (1.60mm x 0.80mm)", Supplier 1=DigiKey
S1: "Switch", LatestRevisionDate=17-Jul-2002, LatestRevisionNote="Re-released for DXP Platform.", PackageReference=SPST-2, Published=24-Mar-1999, Publisher="Altium Limited"
U1: "ARMÂ® CortexÂ®-M3 STM32F1 Microcontroller IC 32-Bit 72MHz 64KB (64K x 8) FLASH 48-LQFP (7x7)", Package="LQFP-48 STMicroelectronics", Availability="In Stock", Check_prices=https://www.snapeda.com/parts/STM32F103C8T6/STMicroelectronics/view-part/?ref=eda, MF=STMicroelectronics, MP=STM32F103C8T6, Price=None, Purchase-URL=https://pricing.snapeda.com/search/part/STM32F103C8T6/?ref=eda, SnapEDA_Link=https://www.snapeda.com/parts/STM32F103C8T6/STMicroelectronics/view-part/?ref=snap
U2: "Gas, Humidity, Pressure, Temperature Sensor IÂ²C, SPI Output", Package="LGA-8 Bosch Tools", Availability="In Stock", Check_prices=https://www.snapeda.com/parts/BME680/Bosch+Sensortec/view-part/?ref=eda, MF="Bosch Sensortec", MP=BME680, Price=None, Purchase-URL=https://pricing.snapeda.com/search/part/BME680/?ref=eda, SnapEDA_Link=https://www.snapeda.com/parts/BME680/Bosch+Sensortec/view-part/?ref=snap
U3 U4: "Linear Voltage Regulator IC 1 Output 250mA SOT-23-3", Package="SOT-23-3 Microchip", Availability=Unavailable, MF=Microchip, MP=MCP1700T-3302E/TT, Price=None, SnapEDA_Link=https://www.snapeda.com/parts/MCP1700T-3302E/TT/Microchip/view-part/50877/?ref=snap
U5: "MPU-6050 series Accelerometer, Gyroscope, 3 Axis Sensor Evaluation Board", Package="QFN-24 InvenSense", Check_prices=https://www.snapeda.com/parts/MPU-6050/TDK+InvenSense/view-part/?ref=eda, MF="TDK InvenSense", MP=MPU-6050, SnapEDA_Link=https://www.snapeda.com/parts/MPU-6050/TDK+InvenSense/view-part/?ref=snap
U6: "17V Clamp 5A (8/20Âµs) Ipp Tvs Diode Surface Mount SOT-23-6", Package="SOT-23-6 STMicroelectronics", Check_prices=https://www.snapeda.com/parts/USBLC6-2SC6/STMicroelectronics/view-part/?ref=eda, MF=STMicroelectronics, MP=USBLC6-2SC6, SnapEDA_Link=https://www.snapeda.com/parts/USBLC6-2SC6/STMicroelectronics/view-part/?ref=snap
Y_M: library part NX5032GA-8MHZ-EXS00A-CG07039, "CRYSTAL 8.0000MHZ 18PF SMD", ESR (Equivalent Series Resistance)="300 Ohms", Frequency Stability=±30ppm, Frequency Tolerance=±20ppm, Load Capacitance=18pF, Manufacturer="NDK America, Inc.", Operating Mode=Fundamental, Operating Temperature="-40°C ~ 85°C", Package / Case="2-SMD, No Lead", Supplier Part Number 1=644-1318-1-ND, componentlink1description=Datasheet, componentlink1url=//media.digikey.com/pdf/Data%20Sheets/NDK%20PDFs/NX5032GA-8MHz-EXS00A-CG07039.pdf, componentlink2description="DigiKey Link", componentlink2url=https://www.digikey.com/en/products/detail/ndk-america-inc/NX5032GA-8MHZ-EXS00A-CG07039/8275423, Frequency="8 MHz", Height - Seated (Max)="0.059\" (1.50mm)", lastupdated="6/3/2024 8:02:22 PM", Lifecycle Status=Active, Minimum Order=1, Mounting Type="Surface Mount", packaging=TapeAndReel, Part Number=NX5032GA-8MHZ-EXS00A-CG07039, Part Status=Active, partid=609, Price=0.32, series=NX5032GA, Size / Dimension="0.197\" L x 0.126\" W (5.00mm x 3.20mm)", Supplier 1=DigiKey, Type="MHz Crystal"

## Free pads (board coordinates)
  round 236.22 hole 122.05: 9(145,140) 9(145,1340) 9(1455,140) 9(1455,1340)

## Via types
v1: diameter 20, hole 11.81, Top Layer to Bottom Layer, 122 vias
v2: diameter 25, hole 15, Top Layer to Bottom Layer, 36 vias

## Nets (pads, with @x,y where several pads share a name; then routed paths per layer and width w, separated by ;. In a path a pad name is that pad's centre, name@x,y a point inside that pad or via, vN(x,y) a via of type N, cw(c..) or ccw(c..) an arc to the next point about the centre after c; other vN are vias at no path point)
+5: C22.2 C23.2 C25.2 C26.2 D1.2 H8.1 U3.3 U4.3 | length 977.3
  Top Layer w7: U3.3 372,206.5 400.16,234.66 ; C22.2 372,235 400.16,234.66 ; U4.3 582,280 582,253.93 581.5,253.43 C23.2 418.93,253.43 400.16,234.66 ; C26.2 700.97,186.57 700.97,237.5 720,256.53 720,280 C25.2
  Top Layer w25: H8.1 301.57,253.43 C22.2 ; U4.3@582,280 C25.2@720,280 ; C25.2 D1.2
+5_USB_A: C34.1 C35.1 C36.1 C37.1 D1.1 J.A4 J.A9 J.B4 J.B9 U6.5 | length 2234.6
  Top Layer w7: D1.1 812,192.76 812,238.16 834.84,261 834.84,300 827.84,307 615,307 599,323 599,400 600,401 649,401 675,375 828.5,375 846.25,392.75 846.25,491 841,496.25 C36.1 867,579.68 868,578.68 C35.1 895,515 948,462 948,386.5 992.25,342.25 1166.25,342.25 1212,388 1212,578.41 1211,579.41 ; J.A4 1030.79,446.97 1032.76,445 J.B9 ; U6.5 1075,623.5 1087.5,611 1112.5,611 1133,590.5 1133,562 ; J.B4 1127.24,445 1129.21,446.97 J.A9 1129.21,504 1133,507.79 1133,562 ; C37.1 1211,579.41 ; 1133,562 1190.24,562 C34.1 1211,579.41
  Bottom Layer w7: J.B9 1061.26,450 1098.74,450 J.B4
AD0_6050: R24.2 U5.9 | length 160.8
  Top Layer w7: v2(511,811) 511,786 522.16,774.84 U5.9
  Bottom Layer w7: v2(511,811) 511,784.2 R24.2@527.2,768
BME_SCL: R20.1 U1.42 U2.4 | length 237.8
  Top Layer w7: U1.42 1272,920.16 1273,919.16 v2(1273,875)
  Bottom Layer w7: v2(1273,875) 1273,942 U2.4 1275,962.76 1276.65,964.41 R20.1
BME_SDA: R21.1 U1.43 U2.3 | length 221.7
  Top Layer w7: v2(1177,991) 1177,940.84 1178,939.84 U1.43
  Bottom Layer w7: v2(1177,991) 1192.5,991 U2.3 1220.75,950.98 1220,950.23 R21.1
BOOT0: R10.2 U1.44 | length 80.9
  Top Layer w7: U1.44 1264,959.53 1265.06,960.59 R10.2
CC1: J.A5 R19.2 | length 157.3
  Top Layer w7: R19.2 960.72,568.69 960.72,546.28 993,514 1029.04,514 1048.07,494.98 1048.07,473.11 J.A5
CC2: J.B5 R18.2 | length 73.6
  Bottom Layer w7: R18.2 1110,342.25 1111.5,343.74 J.B5
GND: C1.1 C2.1 C3.2 C4.1 C5.1 C6.1 C7.1 C18.1 C19.1 C20.1 C21.2 C22.1 C23.1 C24.1 C25.1 C26.1 C27.1 C28.2 C30.1 C31.1 C32.1 C34.2 C35.2 C36.2 C37.2 D10.2 D11.2 D12.2 D13.2 D14.2 D15.2 H3.3 H4.3 H5.2 H7.3 H8.3 J.A1 J.A12 J.B1 J.B12 J.G1 J.G2 J.G3 J.G4 J.S1 J.S2 J.S3 J.S4 JP2.5 R10.1 R12.1 R18.1 R19.1 R24.1 S1.1 U1.8 U1.23 U1.35 U1.47 U2.1 U2.5 U2.7 U3.1 U4.1 U5.1 U5.11 U5.18 U6.2 | length 11968.4
  Top Layer w7: H4.3 130,985 130,625 H8.3 236,519 489,519 490,520 ; C22.1 C23.1 455,364 491.85,400.85 C27.1 491.85,506 490,507.85 490,520 ; H7.3 465,995 D12.2 ; C30.1 474.25,601.75 490,586 R12.1 ; v2(556.05,706.44) 556.05,713.05 578.47,735.47 U5.11 ; D14.2 560.47,71 545,86.47 C24.1 511.85,113.85 491,93 U3.1 424,93 423,193 639.43,194 700,133.43 C26.1 818.43,133.43 ; U4.1 619,362.16 647.65,333.5 C25.1 826.5,333.5 846.84,313.16 846.84,161.84 818.43,133.43 ; U5.18 719.21,580.21 726,573.43 731,573.43 ; U5.1 719.21,867 693.21,893 637.94,893 D13.2 605.94,959 605.47,959.47 D12.2 ; JP2.5 660,1523.32 H3.3 605.47,1225.47 D10.2 D11.2 D12.2 ; v2(793,738) v2@795.81,735.19 ; D15.2 834.25,425.19 834.25,484 833.25,485 769,485 754,500 C31.1 ; v2(860,1163) C1.1 909,1196.85 944.85,1161 1012.5,1161 1030.47,1143.03 U1.8 ; U1.23 861.84,841.42 857,836.57 C5.1 823,815 795.81,809 v2@795.81,735.19 ; J.S1 J.S3 J.S3@911.89,168 ; J.B12 969.76,445 971.73,446.97 J.A1 971.73,504.27 932,544 932,619.59 ; U6.2 1075,584.5 1062.5,597 961,597 960,598 R19.1 933,620.59 932,619.59 ; J.G3 J.G4 1080,168 J.S3@911.89,168 ; U1.35 1148.58,727 1149.58,726 1228.07,726 1241.57,712.5 C7.1 1241.57,655.94 1255.51,642 C37.2 ; J.A12 1188.27,446.97 1190.24,445 J.B1 ; C34.2 C37.2 ; U1.47 1257,1018.58 1271.84,1033.43 C4.1 1332,1033.43 ; J.S4 J.S2 1248.11,432 1277,460.89 1277,613.06 1276,614.06 ; C2.1 1296.03,1196.85 1297.18,1198 1297.18,1223 1298.38,1224.2 1377.07,1224.2 1388.27,1213 1613,1213 1626,1200 1626,1107.13 1589.87,1071 C3.2 1460.77,1060.2 1434,1033.43 1332,1033.43 ; R10.1 1332,909.41 ; 490,520 R12.1 ; R12.1 540,554.45 553.98,568.43 C32.1 630.57,568.43 654,545 702.57,545 731,573.43 ; 731,573.43 C31.1 ; C31.1 796.93,573.43 C36.2@841,617.5 ; v2@795.81,735.19 816,715 C6.1 843.43,619.93 C36.2@841,617.5 ; 818.43,133.43 910.32,133.43 911.89,135 J.S3@911.89,168 ; C36.2@841,617.5 C36.2 867,614.32 868,613.32 C35.2 925.73,613.32 932,619.59 ; C37.2 1276,614.06 ; 1276,614.06 1314,614.06 1339.63,588.43 H5.2 1448,636.43 1448,735 1440,743 S1.1 1440,894.41 1425,909.41 1332,909.41 ; 1332,909.41 1333,910.41 1333,1032.43 1332,1033.43
  Bottom Layer w7: H4.3 H7.3 396,1064 396,1150 ; R24.1 542.95,719.41 555.91,706.44 v2(556.05,706.44) C20.1@583.03,733.43 ; C20.1 585,717.93 602.93,700 C21.2 781,700 782,701 782,727 v2(793,738) ; v2(860,1163) 409,1163 396,1150 ; C28.2 910,1155 860.08,1154.51 396,1150 ; J.S3 911.89,256.3 925,269.41 R18.1 ; J.S1 911.89,396 944.27,396 J.B12 J.G2 1046.76,467 1113.24,467 J.G1 J.B1 1215.73,396 1248.11,396 J.S2 ; C19.1 1110,1024 ; U2.1 1110,1010.51 1110,1024 ; C18.1 1211.57,1108.03 1246.69,1072.92 1246.69,1063.59 U2.5 ; H5.2 1349,639.43 1349,969 1328,990 1275,990 1253.03,1011.97 U2.5 ; 1110,1024 1156.01,1024 U2.7 1209.5,1037 1232.79,1037 U2.5
  other v1: 320,80 400,80 560,80 640,80 1600,80 280,160 680,160 760,160 840,160 1000,160 1160,160 1640,160 240,240 640,240 880,240 960,240 1040,240 1200,240 1280,240 1360,240 1600,240 120,320 280,320 520,320 1160,320 1240,320 1400,320 1480,320 1560,320 1640,320 80,400 240,400 320,400 400,400 480,400 720,400 1520,400 1600,400 120,480 760,480 1240,480 1480,480 1560,480 1640,480 80,560 240,560 1520,560 1600,560 120,640 200,640 1480,640 1560,640 1640,640 80,720 240,720 320,720 1200,720 1280,720 1520,720 1600,720 280,800 1400,800 1480,800 1560,800 1640,800 80,880 560,880 1360,880 1520,880 1600,880 280,960 520,960 600,960 1400,960 1480,960 1560,960 1640,960 80,1040 240,1040 320,1040 1360,1040 1440,1040 1520,1040 120,1120 280,1120 520,1120 840,1120 1400,1120 1640,1120 80,1200 160,1200 1200,1200 1440,1200 1520,1200 1600,1200 280,1280 360,1280 1320,1280 1640,1280 320,1360 400,1360 480,1360 560,1360 640,1360 1040,1360 1120,1360 1200,1360 1280,1360 1600,1360 280,1440 360,1440 440,1440 520,1440 600,1440 1160,1440 1240,1440 1320,1440 1560,1440 1640,1440 1120,1520 680,1600 1000,1600
INT_6050: U5.12
LED1: R1.1 U1.11 | length 1118.7
  Top Layer w7: R1.1 790,1362 708,1444 708,1532 725,1549 787.5,1549 808,1528.5 808,1183 850,1141 971.42,1140 U1.11
LED2: R3.1 U1.12 | length 201.1
  Top Layer w7: R3.1 790,1098.63 791,1099.63 951.73,1099.63 U1.12
LED3: R5.1 U1.13 | length 123.4
  Top Layer w7: R5.1 811.59,994.86 855,1038.27 U1.13
LED4: R6.1 U1.14 | length 156.5
  Top Layer w7: R6.1 790,946.08 862.5,1018.58 U1.14
MOTOR1A: H7.1 U1.40 | length 901.8
  Top Layer w7: v2(1055.5,943) 1117.71,880.79 U1.40
  Bottom Layer w7: H7.1 463,853 530,920 763.16,920 790.16,893 1031.44,893 1055.5,917.06 v2(1055.5,943)
MOTOR1B: H7.2 U1.41 | length 891.2
  Top Layer w7: v2(1055.44,980.5) 1102.97,980.5 1183,900.47 U1.41
  Bottom Layer w7: H7.2 442,932 777,932 804,905 1019.44,905 1030.44,916 1030.44,955.5 v2(1055.44,980.5)
MOTOR2A: H3.1 U1.29 | length 1513.9
  Top Layer w7: v2(374,746.5) 371,749.5 371,1191 H3.1 ; v2(1000,629) 1000,702 1030.47,732.47 U1.29
  Bottom Layer w7: v2(374,746.5) 374,636 446,564 935,564 v2(1000,629)
MOTOR2B: H3.2 U1.30 | length 1719.2
  Top Layer w7: v2(428,743) 428,756.99 395,789.98 395,860.02 419.99,885 451.57,885 475,908.43 475,941.57 444.06,972.5 422.5,972.5 395,1000 395,1047 560,1212 H3.2 ; v2(958,655) 937,676 937,804 938,805 1049.16,805 1050.16,804 U1.30
  Bottom Layer w7: v2(428,743) 428,628.13 472.13,584 887,584 v2(958,655)
MOTOR_FAN_A: H4.1 U1.39 | length 1694.4
  Top Layer w7: v2(947,826) 956,817 1025,817 1042,834 1042,857 976,923 976,968 977,969 1018,969 1019,968 1019,937.5 1095.4,861.1 U1.39
  Bottom Layer w7: H4.1 222,773 452.9,773 457,768.9 457,647 505,599 856,599 947,690 v2(947,826)
MOTOR_FAN_B: H4.2 U1.38 | length 1151.4
  Top Layer w7: v2(997.44,947.56) 997.44,922.56 1078.58,841.42 U1.38
  Bottom Layer w7: H4.2 227.39,982.39 912.61,982.39 947.44,947.56 v2(997.44,947.56)
MPU_SCL: R22.1 U1.21 U5.23 | length 404.9
  Top Layer w7: U5.23 765,794.53 779,808.53 779,862.5 797.29,880.79 v2@855.79,880.79 ; v2(847,872) v2@855.79,880.79 ; U1.21 v2@855.79,880.79
  Bottom Layer w7: R22.1 784,775 785,776 785,868 786,869 844,869 v2(847,872)
MPU_SDA: R23.1 U1.22 U5.24 | length 2348.8
  Top Layer w7: v2(743,888) 748,883 748,814.21 U5.24 ; U1.22 1002.9,861.1 v2(1021,843)
  Bottom Layer w7: v2(743,888) 743,882.41 759.41,866 R23.1 747,840 689.56,897.44 669.06,897.44 658.5,908 559,908 475,824 475,789.98 470.02,785 399.98,785 395,785 315,865 134.99,865 130,860.02 130,789.98 215.95,704.03 374.99,545 953.5,545 1021,612.5 v2(1021,843)
NetC31_2: C31.2 U5.20 | length 140.2
  Top Layer w7: U5.20 771,735.47 772,734.47 772,689 754,671 C31.2
NetC32_2: C32.2 U5.10 | length 259.3
  Top Layer w7: U5.10 592.44,749.48 573.37,749.48 568.39,744.5 568.39,743.69 555.7,731 544.3,731 504,690.7 504,672.3 554.73,621.57 C32.2
NetD10_1: D10.1 R1.2 | length 74.5
  Top Layer w7: D10.1 701,1135 701.43,1134.57 R1.2
NetD11_1: D11.1 R3.2 | length 74.3
  Top Layer w7: D11.1 R3.2
NetD12_1: D12.1 R5.2 | length 74.3
  Top Layer w7: D12.1 701,995 701.14,994.86 R5.2
NetD13_1: D13.1 R6.2 | length 73.8
  Top Layer w7: D13.1 R6.2
NetD14_1: D14.1 R13.1 | length 69
  Top Layer w7: D14.1 619.53,79 620,79.47 R13.1
NetD15_1: D15.1 R14.1 | length 104.4